# Altium PCB Payload.PcbDoc
Units mm, origin at the board's own origin, x right, y up, seen from the top; angles counter-clockwise.
Board outline 47.6 x 56 mm, 2 copper layers (Top Layer, Bottom Layer); 38 components, 56 nets, 178 pads, 137 vias.
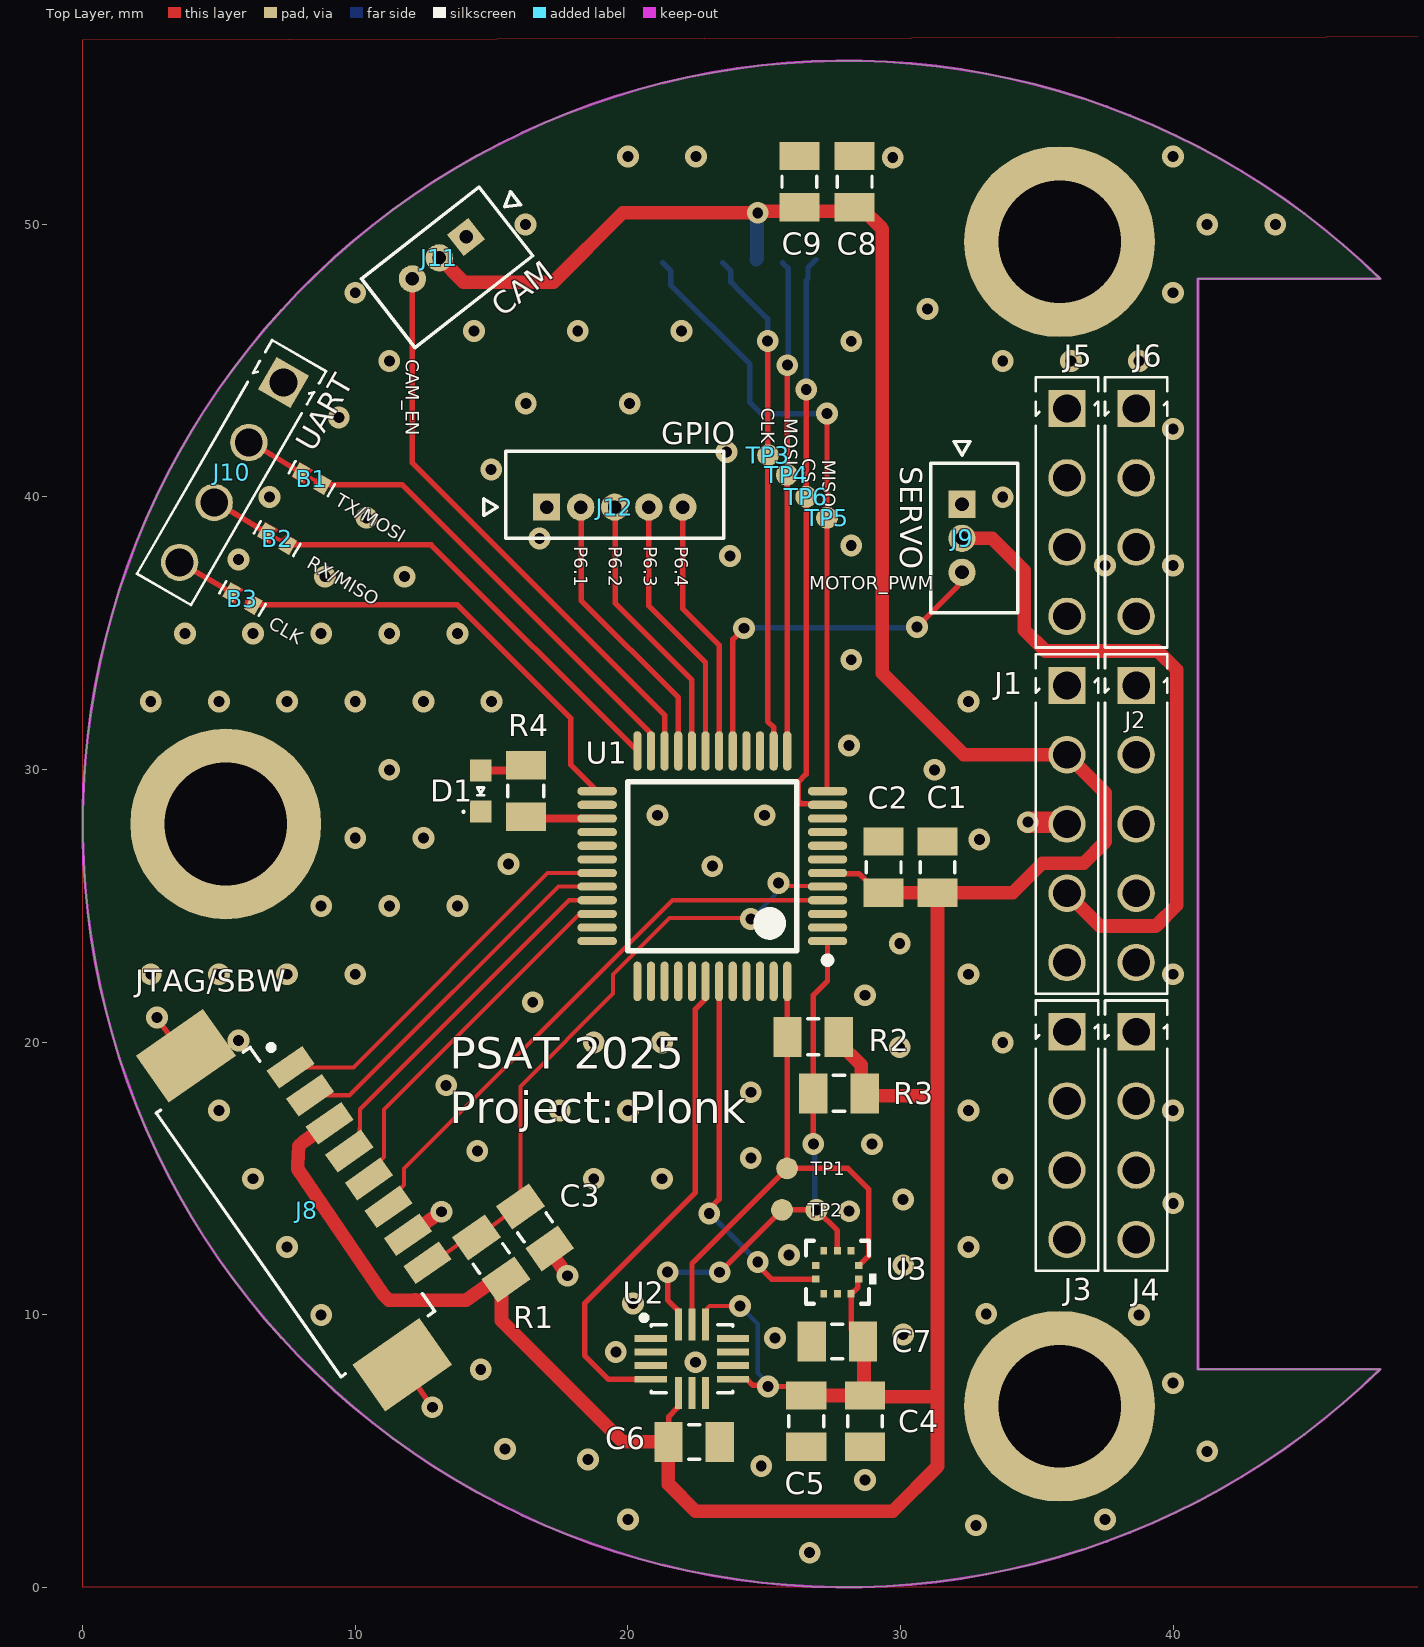
[diagram p0: Top Layer view]
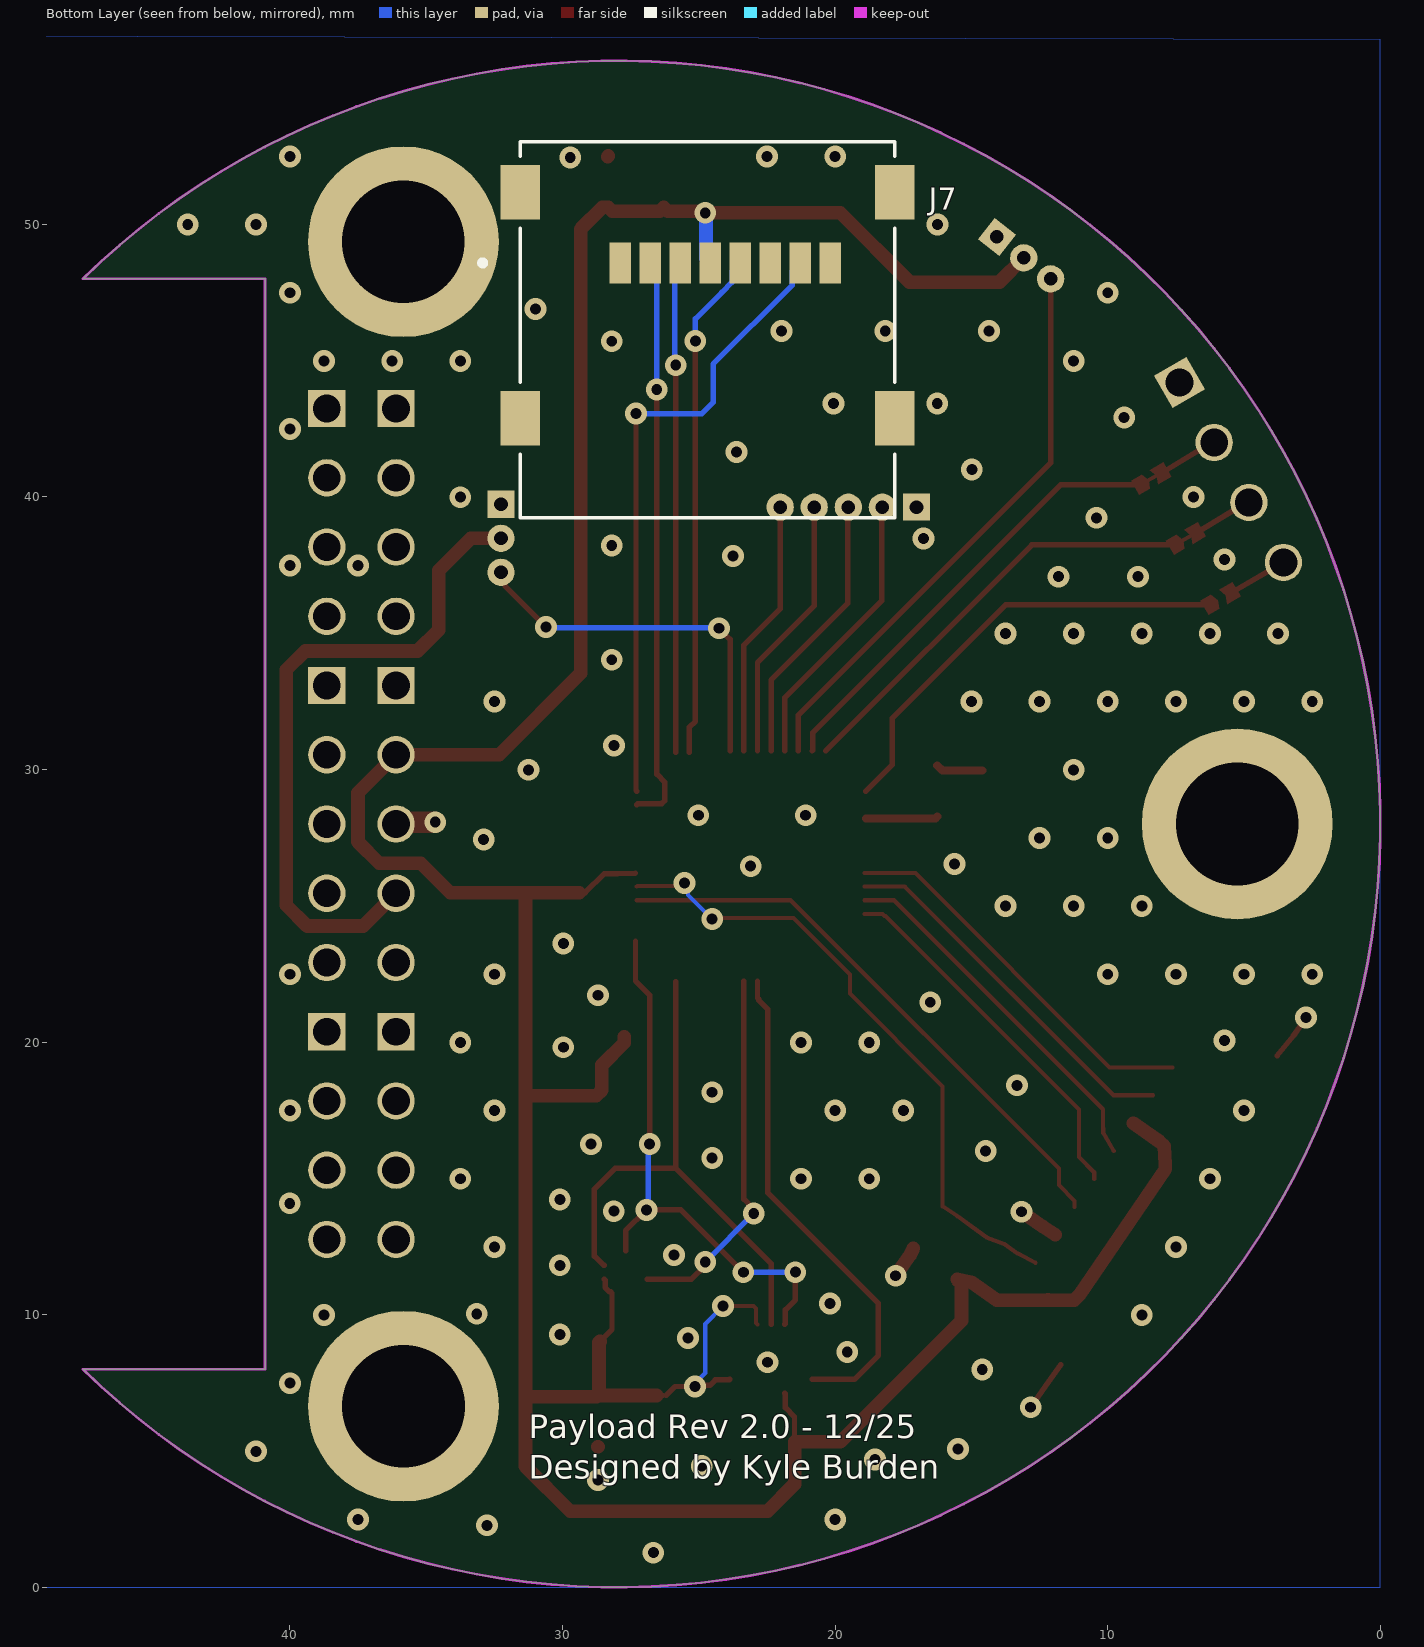
[diagram p1: Bottom Layer view, seen from below]
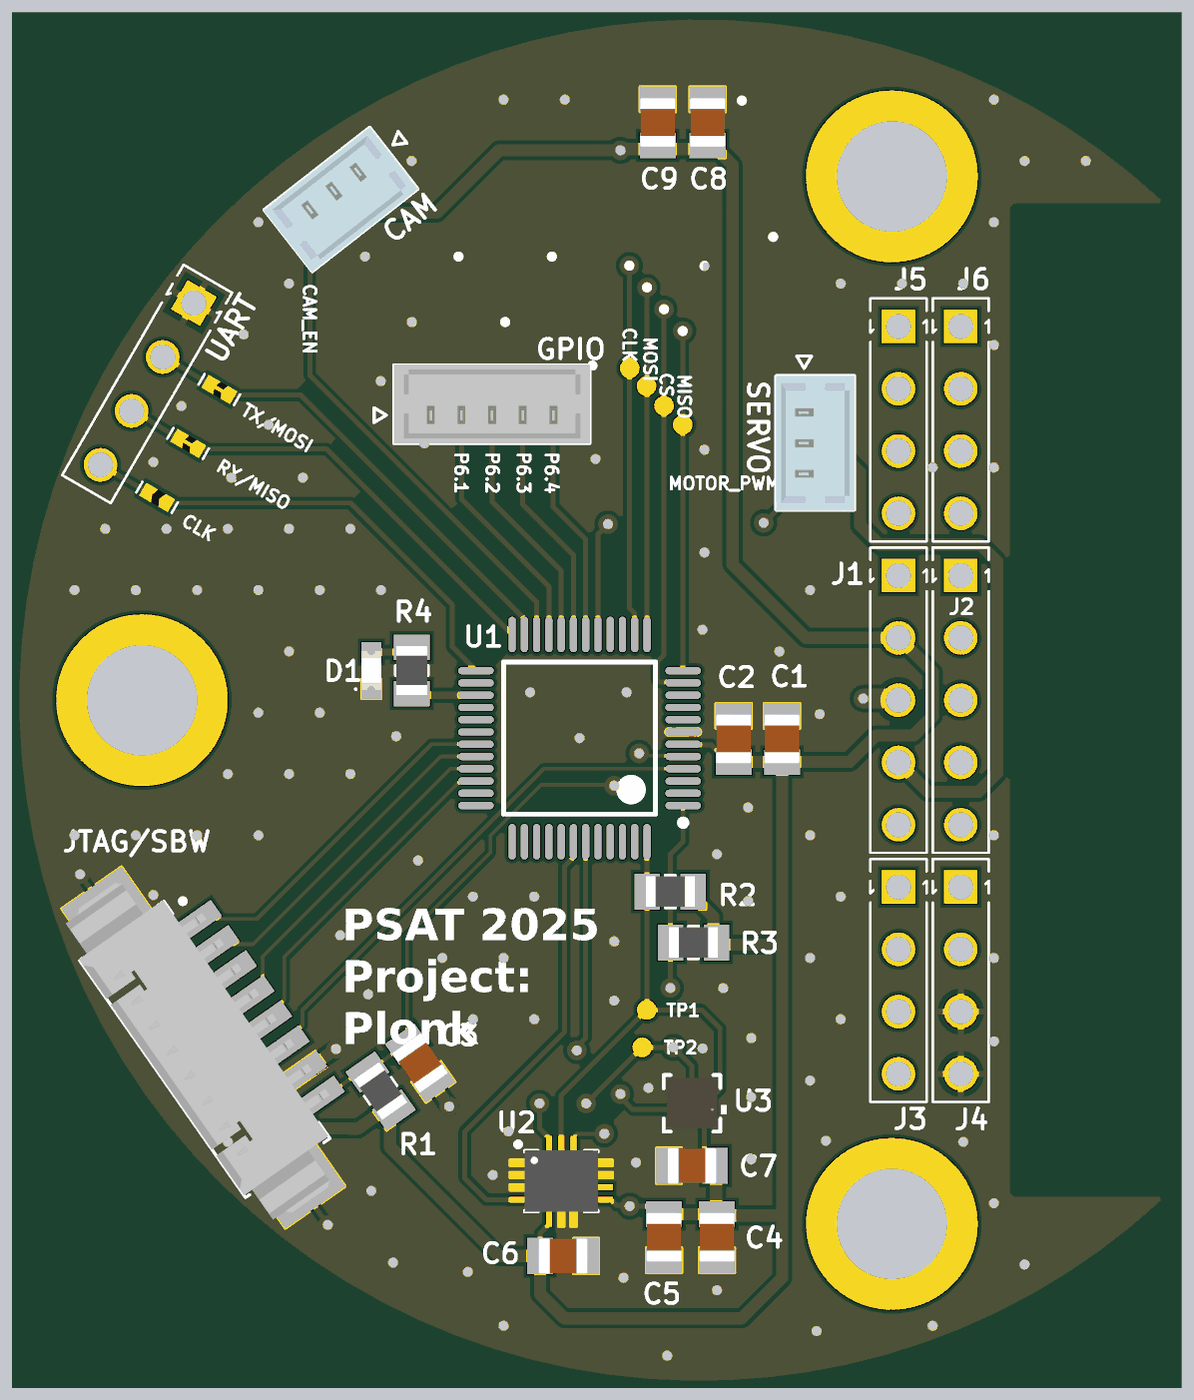
[diagram p2: 3D render of the assembled board from above, using the file's embedded part models]

## Layer stack, top to bottom
Top Solder: solder mask 0.0102, Solder Resist, Dk 3.5
Top Layer: signal copper 0.0356
Dielectric 1: dielectric 0.32, FR-4, Dk 4.8
Bottom Layer: signal copper 0.0356
Bottom Solder: solder mask 0.0102, Solder Resist, Dk 3.5

## Board outline
47.596,8 cw(c28,28) 47.596,48 47.6,48 40.913,48 40.913,8

## Design rules (kind name [scope] priority, off if disabled: settings)
BoardOutlineClearance [All] p1: gap=0.254 ignorepadtopadclearanceinfootprint=FALSE except(0: Arc-SplitContinuation Track-SplitContinuation SMDPad-SplitContinuation THPad-SplitContinuation Via-SplitContinuation Fill-SplitContinuation Poly-SplitContinuation Region-SplitContinuation Text-SplitContinuation)
Clearance [All] p1: gap=0.152 ignorepadtopadclearanceinfootprint=FALSE
ComponentClearance [All] p1: gap=0.1 collisioncheckmode=3 verticalgap=0.254 showdistances=FALSE
HoleSize [All] p1: absolutevalues=TRUE maxlimit=6.2 minlimit=0.3 maxpercent=80.000 minpercent=20.000
MinimumAnnularRing [All] p1: minimumring=0.15
MinimumSolderMaskSliver [All] p1: minsoldermaskwidth=0.1
PolygonConnect ViaConnect [IsVia] p1: connectstyle=Direct reliefconductorwidth=0.254 reliefentries=4 polygonreliefangle="90 Angle" airgapwidth=0.254
PolygonConnect [All] p2: thpad.connectstyle=Relief thpad.reliefconductorwidth=0.254 thpad.reliefentries=4 thpad.polygonreliefangle="90 Angle" thpad.airgapwidth=0.254 smdpad.connectstyle=Direct smdpad.reliefconductorwidth=0.254 smdpad.reliefentries=4 smdpad.polygonreliefangle="90 Angle" smdpad.airgapwidth=0.254 via.connectstyle=Relief via.reliefconductorwidth=0.254 via.reliefentries=4 via.polygonreliefangle="90 Angle" via.airgapwidth=0.254
RoutingVias [All] p1: holewidth=0.3 width=0.6 viastyle="Through Hole" minholewidth=0.3 minwidth=0.5 maxholewidth=1 maxwidth=5
SilkToSilkClearance [All] p1: silktosilkclearance=0.1
SilkToSolderMaskClearance [IsPad] p1: minsilkscreentomaskgap=0.1 clearancetoexposedcopper=TRUE
SolderMaskExpansion [All] p1: expansion=0.051 istentingtop=FALSE
SupplyNets "Schematic Supply Nets_3" [InNet('LED_RED')] p1: voltage=0.000
SupplyNets "Schematic Supply Nets_2" [InNet('+3V3')] p2: voltage=0.000
SupplyNets "Schematic Supply Nets_1" [InNet('GND')] p3: voltage=0.000
SupplyNets "Schematic Supply Nets" [InNet('+5V')] p4: voltage=0.000
Width [All] p1: maxlimit=25.4 minlimit=0.15 preferedwidth=0.3
25 further rules are at their usual default settings.

## Components (designator, comment, footprint, x,y, rotation, side; value= is the part's Value field where it differs from the comment)
B1 "Solder Jumper Normally Closed" "Solder Bridge Chevron 0402 Closed" 8.404,40.668 r150 top locked net-tie
B2 "Solder Jumper Normally Closed" "Solder Bridge Chevron 0402 Closed" 7.134,38.469 r150 top locked net-tie
B3 "Solder Jumper Normally Open" "Solder Bridge Chevron 0402 Open" 5.864,36.269 r150 top locked
C1 "22u" CAPACITOR_0805_2012M-70N 31.36,26.421 r270 top
C2 "100n" CAPACITOR_0805_2012M-70N 29.385,26.421 r270 top
C3 "10n" CAPACITOR_0805_2012M-70N 16.595,13.203 r125 top
C4 "2u2" CAPACITOR_0805_2012M-70N 28.702,6.096 r90 top
C5 "100n" CAPACITOR_0805_2012M-70N 26.543,6.096 r90 top
C6 "10n" CAPACITOR_0805_2012M-70N 22.428,5.334 r180 top
C7 "100n" CAPACITOR_0805_2012M-70N 27.686,9.017 r0 top
C8 "22u" CAPACITOR_0805_2012M-70N 28.321,51.562 r270 top
C9 "100n" CAPACITOR_0805_2012M-70N 26.289,51.562 r270 top
D1 "LTST-C190 Series" LED_0603_1608M_0.80mm 14.605,29.21 r90 top
J1 "Header - 2.54mm,1x5-pin" HEADER_2.54MM_1X5PIN 36.107,28 r270 top locked
J2 "Header - 2.54mm,1x5-pin" HEADER_2.54MM_1X5PIN 38.647,28 r270 top locked
J3 "Header - 2.54mm,1x4-pin" HEADER_2.54MM_1X4PIN 36.107,16.57 r270 top locked
J4 "Header - 2.54mm,1x4-pin" HEADER_2.54MM_1X4PIN 38.647,16.57 r270 top locked
J5 "Header - 2.54mm,1x4-pin" HEADER_2.54MM_1X4PIN 36.107,39.43 r270 top locked
J6 "Header - 2.54mm,1x4-pin" HEADER_2.54MM_1X4PIN 38.647,39.43 r270 top locked
J7 "MSD-10-C" MSD-10-C 24.681,46.131 r0 bottom locked
J8 "0532610871" MOLEX_0532610871 7.762,13.827 r305 top locked
J9 "0530470310" MOLEX_0530470310 32.258,38.481 r90 top
J10 "HDR,2.54mm,1x4" HEADER_2.54MM_1x4PIN 5.461,40.894 r240 top
J11 "0530470310" MOLEX_0530470310 13.081,48.768 r38 top
J12 "0530470510" MOLEX_0530470510 19.518,39.624 r180 top
R1 "47k" RESISTOR_0805_2012M-50N 14.986,12.065 r305 top
R2 "4k7" RESISTOR_0805_2012M-50N 26.797,20.193 r0 top
R3 "4k7" RESISTOR_0805_2012M-50N 27.745,18.116 r0 top
R4 "150R" Resistor_0805_2012M-50N 16.256,29.21 r270 top
TP1 "Test Point" "Test Point Pad Medium" 25.841,15.367 r90 top
TP2 "Test Point" "Test Point Pad Medium" 25.654,13.843 r90 top
TP3 "Test Point" "Test Point Pad Medium" 25.146,41.529 r90 top
TP4 "Test Point" "Test Point Pad Medium" 25.831,40.809 r90 top
TP5 "Test Point" "Test Point Pad Medium" 27.305,39.231 r90 top
TP6 "Test Point" "Test Point Pad Medium" 26.543,40.005 r90 top
U1 "MSP430FR2355" PT0048A_N 23.099,26.453 r180 top
U2 "ICM-42670-P" XDCR_ICM-42670-P-EXTENDED_PADS 22.352,8.382 r0 top
U3 "BMP390" BMP390 27.686,11.557 r180 top

## Footprints (in the part's own frame and the unit in brackets; to place one, negate y for a bottom-side part, rotate by r counter-clockwise, add the part's x,y. Pads: shape width x height; smd on the part's side, far side on the other; paste and mask are expansions set on the pad)
BMP390 [mil] "Pressure Sensor"
  rect 11x10 smd paste+0 mask+0: 1(-31,9.84) 2(-31,-9.84) 6(31,-9.84) 7(31,9.84)
  rect 10x11 smd paste+0 mask+0: 3(-19.68,-31) 4(0,-31) 5(19.68,-31) 8(19.68,31) 9(0,31) 10(-19.68,31)
  silkscreen extent -56,-46 46,46, body extent -41,-41 41,41, height 32
CAPACITOR_0805_2012M-70N [mm] "Capacitor, 0805 (2012 metric), 0.7mm high, nominal pads,"
  rect 1.04x1.47 smd mask+0.051: 1(-0.94,0) 2(0.94,0)
  silkscreen extent -0.2,-0.64 0.2,0.64, body extent -1,-0.73 1,0.73, height 1.23
HEADER_2.54MM_1X4PIN [mm]
  rect 1.37x1.37 hole 1.02: 1(-3.81,0)
  round 1.37 hole 1.02: 2(-1.27,0) 3(1.27,0) 4(3.81,0)
  silkscreen extent -4.95,-1.14 4.95,1.14
HEADER_2.54MM_1x4PIN [mm]
  rect 1.37x1.37 hole 1.02: 1(-3.81,0)
  round 1.37 hole 1.02: 2(-1.27,0) 3(1.27,0) 4(3.81,0)
  silkscreen extent -4.95,-1.14 4.95,1.14, body extent -4.95,-1.14 4.95,1.14, height 8.2
HEADER_2.54MM_1X5PIN [mm]
  rect 1.37x1.37 hole 1.02: 1(-5.08,0)
  round 1.37 hole 1.02: 2(-2.54,0) 3(0,0) 4(2.54,0) 5(5.08,0)
  silkscreen extent -6.22,-1.14 6.22,1.14
LED_0603_1608M_0.80mm [mm] "LED, 0603 (1608 metric), 0.8mm high"
  rect 0.8x0.8 smd mask+0.051: A(0.75,0) C(-0.75,0)
  silkscreen extent -0.79,-0.12 0.13,0.66, body extent -0.8,-0.4 0.8,0.4, height 0.8
MOLEX_0530470310 [mm] "Header - Picoblade 03-pin, TH, STR, 4.2mm height"
  rect 1x1 hole 0.5 mask+0.051: 1(1.25,0)
  round 1 hole 0.5 mask+0.051: 2(0,0) 3(-1.25,0)
  silkscreen extent -2.73,-2.05 3.55,1.15, body extent -2.75,-2.06 2.75,1.14, height 4.21
MOLEX_0530470510 [mm] "Header - Picoblade 05-pin, TH, STR, 4.2mm height"
  rect 1x1 hole 0.5 mask+0.051: 1(2.5,0)
  round 1 hole 0.5 mask+0.051: 2(1.25,0) 3(0,0) 4(-1.25,0) 5(-2.5,0)
  silkscreen extent -4,-2.05 4.8,1.15, body extent -4.01,-2.06 3.99,1.14, height 4.21
MOLEX_0532610871 [mm] "Header - Picoblade 08-pin, SMT, RA, 3.4mm height"
  rect 0.8x1.6 smd mask+0.051: 1(-4.375,2.9) 2(-3.125,2.9) 3(-1.875,2.9) 4(-0.625,2.9) 5(0.625,2.9) 6(1.875,2.9) 7(3.125,2.9) 8(4.375,2.9)
  rect 2.1x3 smd mask+0.051: MP1(-6.925,0) MP2(6.905,0)
  silkscreen extent -5.83,-2.1 5.99,2.83, body extent -7.57,-2.1 7.58,3.1, height 3.42
MSD-10-C [mm] "SM Micro SD Card Connector"
  rect 0.8x1.5 smd: 01(3.2,-2.45) 02(2.1,-2.45) 03(1,-2.45) 04(-0.1,-2.45) 05(-1.2,-2.45) 06(-2.3,-2.45) 07(-3.4,-2.45) 08(-4.5,-2.45)
  rect 1.45x2 smd: G1(-6.875,3.25) G2(6.875,3.25) G3(-6.875,-5.05) G4(6.875,-5.05)
  silkscreen extent -6.88,-6.9 8.35,6.9, body extent -7.3,-7.1 7.3,7.1, height 1.89
PT0048A_N [mm]
  oval 1.45x0.3 smd paste+0 mask+0.051: 1(-4.225,2.75) 2(-4.225,2.25) 3(-4.225,1.75) 4(-4.225,1.25) 5(-4.225,0.75) 6(-4.225,0.25) 7(-4.225,-0.25) 8(-4.225,-0.75) 9(-4.225,-1.25) 10(-4.225,-1.75) 11(-4.225,-2.25) 12(-4.225,-2.75) 25(4.225,-2.75) 26(4.225,-2.25) 27(4.225,-1.75) 28(4.225,-1.25) 29(4.225,-0.75) 30(4.225,-0.25) 31(4.225,0.25) 32(4.225,0.75) 33(4.225,1.25) 34(4.225,1.75) 35(4.225,2.25) 36(4.225,2.75)
  oval 0.3x1.45 smd paste+0 mask+0.051: 13(-2.75,-4.225) 14(-2.25,-4.225) 15(-1.75,-4.225) 16(-1.25,-4.225) 17(-0.75,-4.225) 18(-0.25,-4.225) 19(0.25,-4.225) 20(0.75,-4.225) 21(1.25,-4.225) 22(1.75,-4.225) 23(2.25,-4.225) 24(2.75,-4.225) 37(2.75,4.225) 38(2.25,4.225) 39(1.75,4.225) 40(1.25,4.225) 41(0.75,4.225) 42(0.25,4.225) 43(-0.25,4.225) 44(-0.75,4.225) 45(-1.25,4.225) 46(-1.75,4.225) 47(-2.25,4.225) 48(-2.75,4.225)
  silkscreen extent -4.35,-3.1 3.1,3.57, body extent 0,0 0.25,0.25, height 0.25
RESISTOR_0805_2012M-50N [mm] "Resistor, 0805 (2012 metric), nominal pads"
  rect 1.04x1.47 smd mask+0.051: 1(-0.94,0) 2(0.94,0)
  silkscreen extent -0.2,-0.66 0.2,0.66, body extent -1,-0.63 1,0.62, height 0.5
Resistor_0805_2012M-50N [mm] "Resistor, 0805 (2012 metric), nominal pads"
  rect 1.04x1.47 smd mask+0.051: 1(-0.94,0) 2(0.94,0)
  silkscreen extent -0.2,-0.66 0.2,0.66, body extent -1,-0.63 1,0.62, height 0.5
"Solder Bridge Chevron 0402 Closed" [mm] "Small solder bridge. Shorted."
  rect 0.44x0.6 smd paste-2539.97 mask+0: 1(-0.457,0) 2(0.457,0)
  Top Layer region: 0.677,0.3 0.677,0 0.227,0 0.113,0.3
  Top Layer region: 0.677,-0.3 0.677,0 0.227,0 0.113,-0.3
  Top Layer region: -0.677,-0.3 -0.677,0.3 -0.237,0.3 -0.112,0 -0.237,-0.3
  Top Layer lines w0.15: 0.25,0 -0.2,0
  silkscreen extent -0.83,-0.25 0.83,0.25
"Solder Bridge Chevron 0402 Open" [mm] "Small solder bridge. Open."
  rect 0.44x0.6 smd paste-2539.97 mask+0: 1(-0.457,0) 2(0.457,0)
  Top Layer region: -0.677,-0.3 -0.677,0.3 -0.237,0.3 -0.112,0 -0.237,-0.3
  Top Layer region: 0.677,-0.3 0.677,0 0.227,0 0.113,-0.3
  Top Layer region: 0.677,0.3 0.677,0 0.227,0 0.113,0.3
  silkscreen extent -0.83,-0.25 0.83,0.25
"Test Point Pad Medium" [mm] "Exposed copper pad, 0.8mm dia."
  round 0.8 smd paste-10 mask+0.051: 1(0,0)
XDCR_ICM-42670-P-EXTENDED_PADS [mm]
  rect 1.175x0.25 smd paste-1 mask+0.05: 1(-1.512,0.75) 2(-1.512,0.25) 3(-1.512,-0.25) 4(-1.512,-0.75) 8(1.512,-0.75) 9(1.512,-0.25) 10(1.512,0.25) 11(1.512,0.75)
  rect 0.25x1.175 smd paste-1 mask+0.05: 5(-0.5,-1.262) 6(0,-1.262) 7(0.5,-1.262) 12(0.5,1.262) 13(0,1.262) 14(-0.5,1.262)
  silkscreen extent -1.86,-1.25 1.5,1.6, body extent -1.5,-1.25 1.5,1.25, height 0.81

## Part data
C1 C2 C3 C4 C5 C6 C7 C8 C9: library part "Generic Capacitor", "Passive - Capacitor, Generic", Tolerance=?%
D1: "Diode - LED, 0603", Colour=RED, Package=0603, Rated Voltage="5V Reverse", Temp Range="-30°C ~ 85°C", APSS Standard Part="APSS Standard", Supplier 1=Digikey
J7: "SM Micro SD Card Connector", ComponentLink1Description=Datasheet, ComponentLink1URL=https://www.sameskydevices.com/product/resource/msd-10-c.pdf
J8: "Connector - Picoblade 08-pin, SMT, RA", Supplier 1 Part No.=WM7626CT-ND, APSS Standard Part="APSS Standard", MF Part No.=0532610871, Mounting Type="Surface Mount", Orientation="Right Angle", Pins=8, Pitch=1.25mm, Supplier 1=Digikey
J9 J11: "Connector - Picoblade 03-pin, TH, STR", Supplier 1 Part No.=WM1732-ND, APSS Standard Part="APSS Standard", MF Part No.=0530470310, Mounting Type=Through-hole, Orientation=Straight, Pins=3, Pitch=1.25mm, Supplier 1=Digikey
J10: "Connector - 2.54mm, 1x4-pin"
J12: "Connector - Picoblade 05-pin, TH, STR", Supplier 1 Part No.=WM1734-ND, APSS Standard Part="APSS Standard", MF Part No.=0530470510, Mounting Type=Through-hole, Orientation=Straight, Pins=5, Pitch=1.25mm, Supplier 1=Digikey
R1 R2 R3: library part "Generic Resistor", "Passive - Resistor, Generic", Tolerance=?%
R4: library part "RES SM 0805", "0805 Surface Mount Resistor"
U1: "24-MHz 105-C integrated analog microcontroller with 32-KB FRAM, Op-Amps/PGAs, 12-bit DACs, 12-bit AD", ComponentLink1Description=Datasheet, ComponentLink1URL=https://www.ti.com/lit/ds/symlink/msp430fr2355.pdf?HQS=dis-dk-null-digikeymode-dsf-pf-null-wwe&ts=1766128428387&ref_url=https%253A%252F%252Fwww.ti.com%252Fgeneral%252Fdocs%252Fsuppproductinfo.tsp%253FdistId%253D10%2526gotoUrl%253Dhttps%253A%252F%252Fwww.ti.com%252Flit%252Fgpn%252Fmsp430fr2355
U2: "IC - Inertial Management Unit: Accelerometer + Gyro + Temperature Sensor, 6 Axis, I2C / I3C / SPI Interfaces", Package=14-LGA, Rated Voltage=3.6V, Supplier 1 Part No.=1428-ICM-42670-PCT-ND, Temp Range="-40°C ~ 85°C", APSS Standard Part="APSS Standard", MF Part No.=ICM-42670-P, Supplier 1=Digikey
U3: "Pressure Sensor", ComponentLink1Description=Datasheet, ComponentLink1URL=https://www.bosch-sensortec.com/products/environmental-sensors/pressure-sensors/bmp390/
B1 B2 B3: DEBUG=DEBUG

## Free pads (board coordinates)
  round 7 hole 4.5: 1(5.25,28) 1(35.837,6.643) 1(35.837,49.357)

## Via types
v1: diameter 0.8, hole 0.4, Top Layer to Bottom Layer, tented both sides, 137 vias

## Nets (pads, with @x,y where several pads share a name; then routed paths per layer and width w, separated by ;. In a path a pad name is that pad's centre, name@x,y a point inside that pad or via, vN(x,y) a via of type N, cw(c..) or ccw(c..) an arc to the next point about the centre after c; other vN are vias at no path point)
1V8_PG: J2.1
3V3_PG: J2.2
+1V8: J1.1
+3V3: C1.2 C2.2 C4.2 C5.2 C6.2 C7.2 C8.2 C9.2 J1.2 J7.04 J8.3 J11.2 R1.2 R2.2 R3.2 U1.6 U2.5 U2.8 U2.12 U3.1 U3.10 | length 139.6
  Top Layer w0.15: U2.12 22.902,9.694 22.902,10.23 22.99,10.317 v1(24.108,10.317)
  Top Layer w0.2: C6.2 21.492,5.338 21.492,6.252 21.827,6.587 21.827,7.094 U2.5 ; U2.8 23.89,7.607 24.397,7.607 24.597,7.407 25.105,7.407 v1(25.146,7.366) 25.871,7.366 C5.2@26.201,7.036 ; C5.2@26.328,7.036 C5.2 ; U1.6 27.343,26.184 27.988,26.184 27.992,26.181 28.47,26.181 29.17,25.481 C2.2 ; U3.10@28.186,10.757 28.186,9.457 C7.2 ; U3.10 28.186,10.782 28.238,10.834 28.27,10.834 28.438,11.003 28.438,11.272 U3.1
  Top Layer w0.5: J8.3 8.611,16.71 8.094,16.348 7.93,16.184 7.885,15.523 7.885,15.351 11.051,10.714 11.231,10.535 11.442,10.535 12.192,10.541 cw(c12.195,10.139) 12.197,10.541 13.907,10.532 14.066,10.532 15.006,11.19 R1.2 15.367,11.137 15.367,9.779 19.812,5.334 C6.2 21.488,3.785 22.479,2.794 29.718,2.794 31.36,4.436 31.36,6.985 ; J11.2 13.97,47.879 17.272,47.879 19.812,50.419 v1(24.765,50.419) 24.822,50.476 26.143,50.476 C9.2 26.434,50.477 28.176,50.477 C8.2 28.536,50.622 29.337,49.821 29.337,33.528 32.325,30.54 J1.2 37.504,29.143 37.504,27.344 36.722,26.562 35.198,26.562 34.117,25.481 C1.2 ; C5.2 C4.2 ; R2.2 27.737,19.978 28.557,19.158 28.557,18.244 28.767,18.034 31.36,18.034 ; C7.2 28.664,8.979 28.664,7.074 C4.2 ; C2.2 C1.2 ; C4.2 28.753,6.985 31.36,6.985 ; 31.36,6.985 31.36,18.034 ; 31.36,18.034 C1.2
  Bottom Layer w0.15: v1(24.108,10.317) 24.765,9.661 24.765,7.869 25.146,7.488 v1(25.146,7.366)
  Bottom Layer w0.5: J7.04@24.708,48.708 24.736,48.736 24.736,50.39 v1(24.765,50.419)
+5V: J1.4 J9.2 | length 24.6
  Top Layer w0.5: J9.2 33.362,38.481 34.544,37.299 34.544,35.119 35.316,34.347 39.44,34.347 40.132,33.654 40.132,25.019 39.37,24.257 37.31,24.257 J1.4
BUZZER_EN: J3.4
CAM_EN: J11.3 U1.22 | length 21.2
  Top Layer w0.2: J11.3 12.096,41.244 21.349,31.991 U1.22
EN_1V8: J2.3
EN_3V3: J2.4
EN_5V: J2.5
GND: C1.1 C2.1 C3.1 C4.1 C5.1 C6.1 C7.1 C8.1 C9.1 D1.C J1.3 J4.3 J4.4 J7.06 J7.G1 J7.G2 J7.G3 J7.G4 J8.7 J8.MP1 J8.MP2 J9.1 J10.1 J11.1 J12.1 U1.7 U2.1 U2.2 U2.3 U2.6 U2.7 U2.10 U2.11 U3.3 U3.5 U3.6 U3.8 U3.9 | length 7.9
  Top Layer w0.2: v1(2.724,20.9) 3.188,20.237 J8.MP1 ; J8.MP2 12.273,7.396 v1(12.827,6.604)
  Top Layer w0.5: J8.7 12.388,13.235 v1(13.161,13.777) ; C3.1 17.251,12.185 v1(17.78,11.43) ; C8.1 C8.1@28.347,52.476 ; C4.1 C4.1
  Top Layer w0.8: v1(34.671,28.067) 36.04,28.067 J1.3
  other v1: 26.67,1.27 32.766,2.274 20,2.488 37.5,2.488 28.702,3.937 24.892,4.445 18.542,4.687 41.25,4.988 15.494,5.068 40,7.488 14.605,7.989 22.479,8.255 19.558,8.636 25.4,9.144 30.099,9.271 8.75,9.988 38.75,9.988 33.147,10.033 20.193,10.414 30.099,11.811 25.908,12.192 7.5,12.488 32.5,12.488 28.118,13.798 40.005,14.085 30.099,14.224 6.25,14.988 18.75,14.988 21.25,14.988 33.75,14.988 24.511,15.748 14.478,16.002 28.956,16.256 5,17.488 17.5,17.488 20,17.488 32.5,17.488 40,17.488 24.511,18.161 13.335,18.415 29.972,19.812 18.75,19.988 21.25,19.988 33.75,19.988 5.715,20.054 16.51,21.463 28.702,21.717 2.5,22.488 5,22.488 7.5,22.488 10,22.488 32.5,22.488 40,22.488 29.972,23.622 8.75,24.988 11.25,24.988 13.75,24.988 23.099,26.453 15.621,26.531 32.893,27.432 10,27.488 12.5,27.488 21.082,28.321 25.019,28.321 11.25,29.988 31.25,29.988 28.115,30.877 2.5,32.488 5,32.488 7.5,32.488 10,32.488 12.5,32.488 15,32.488 32.5,32.488 28.194,34.024 3.75,34.988 6.25,34.988 8.75,34.988 11.25,34.988 13.75,34.988 8.89,37.072 11.811,37.072 37.5,37.488 40,37.488 5.715,37.707 23.749,37.834 28.194,38.215 16.764,38.469 10.414,39.231 33.75,39.988 6.858,39.993 14.986,41.009 23.622,41.644 40,42.488 9.398,42.914 16.256,43.422 20.066,43.422 11.25,44.988 33.75,44.988 36.25,44.988 38.75,44.988 28.194,45.708 14.351,46.089 18.161,46.089 21.971,46.089 30.996,46.893 10,47.488 40,47.488 16.25,49.988 41.25,49.988 43.75,49.988 29.718,52.451 20,52.488 22.5,52.488 40,52.488
GPIO_6.1: J12.2 U1.21 | length 10.4
  Top Layer w0.2: J12.2 18.288,39.604 18.288,36.195 21.849,32.634 U1.21
GPIO_6.2: J12.3 U1.20 | length 10.1
  Top Layer w0.2: J12.3 19.538,39.604 19.538,36.088 22.349,33.277 U1.20
GPIO_6.3: J12.4 U1.19 | length 9.8
  Top Layer w0.2: J12.4 20.768,36.001 22.849,33.92 U1.19
GPIO_6.4: J12.5 U1.18 | length 9.5
  Top Layer w0.2: J12.5 22.018,35.894 23.349,34.563 U1.18
GPS_EN: J3.3
GPS_RX: J3.2
GPS_TX: J3.1
I2C_SCL: J6.4
I2C_SDA: J6.3
IMU_INT: U1.42 U2.4 | length 18.3
  Top Layer w0.2: U2.4 19.292,7.632 18.415,8.509 18.415,10.414 22.479,14.478 22.479,21.215 22.799,21.534 22.799,21.576 22.849,21.626 U1.42
JTAG_TEST/SBW_TCK: J8.6 U1.4 | length 21.2
  Top Layer w0.15: J8.6 11.213,14.171 11.795,14.754 11.795,15.359 21.64,25.203 U1.4@27.279,25.203
LED_RED: R4.2 U1.27 | length 2.6
  Top Layer w0.3: R4.2 16.323,28.203 U1.27
LoRa_CS: J5.1
LORA_RX_IRQ: J4.1
MOTOR_PWM: J9.3 U1.17 | length 13.7
  Top Layer w0.2: U1.17 23.849,34.771 v1(24.257,35.179) ; v1(30.608,35.231) 32.105,36.728 32.105,37.078 J9.3
  Bottom Layer w0.2: v1(24.257,35.179) 24.283,35.205 30.582,35.205 v1(30.608,35.231)
MSP_P1.0: J6.1
MSP_P1.1: J6.2
MSP_P5.2: J4.2
NetB1_2: B1.2 J10.2 | length 2.4
  Top Layer w0.2: J10.2@5.969,42.121 8.003,40.888 B1.2@8.017,40.879
NetB2_2: B2.2 J10.3 | length 2.4
  Top Layer w0.2: J10.3@4.699,39.921 6.733,38.689 B2.2@6.737,38.686
NetB3_2: B3.2 J10.4 | length 2.4
  Top Layer w0.2: J10.4@3.429,37.721 3.439,37.684 3.476,37.647 3.495,37.628 5.36,36.551 B3.2@5.458,36.495
NetD1_A: D1.A R4.1 | length 1.7
  Top Layer w0.3: D1.A 16.066,29.96 R4.1
PU_INT: U1.43 U3.7 | length 13.6
  Top Layer w0.2: v1(22.987,13.716) 22.987,13.878 23.349,14.24 U1.43 ; v1(24.765,11.938) 24.765,11.811 25.269,11.307 U3.7
  Bottom Layer w0.2: v1(22.987,13.716) v1(24.765,11.938)
Reset/SBW_TDIO: C3.2 J8.8 R1.1 U1.5 | length 23.4
  Top Layer w0.15: J8.8 J8.8@13.297,12.242 ; J8.8@13.298,12.242 13.807,12.598 R1.1 14.981,13.223 15.508,13.605 C3.2 ; C3.2@16.059,13.975 16.059,18.378 19.46,21.779 19.46,22.486 21.521,24.547 24.475,24.547 v1(24.511,24.511) ; v1(25.527,25.831) 25.626,25.732 27.25,25.732 U1.5@27.279,25.703
  Bottom Layer w0.15: v1(24.511,24.511) 25.403,25.403 25.403,25.706 v1(25.527,25.831)
SPI_MISO: J5.4
SPI_MOSI: J5.3
SPI_SCK: J5.2
UCA0_CLK/JTAG_TMS: J8.4 U1.33 | length 13.6
  Top Layer w0.15: J8.4 10.166,16.67 10.174,17.063 10.174,17.229 10.171,17.537 17.837,25.203 U1.33@18.919,25.203
UCA0_RX/MISO/JTAG_TDI: J8.2 U1.32 | length 13.7
  Top Layer w0.15: J8.2 9.795,18.05 17.448,25.703 U1.32@18.919,25.703
UCA0_STE/JTAG_TCK: J8.5 U1.34 | length 13.6
  Top Layer w0.15: J8.5 10.496,15.224 11.049,15.777 11.049,17.526 18.151,24.628 18.183,24.628 18.258,24.703 U1.34@18.919,24.703
UCA0_TX/MOSI/JTAG_TDO: J8.1 U1.31 | length 14.2
  Top Layer w0.15: J8.1 9.93,19.074 17.059,26.203 U1.31@18.919,26.203
UCA1_CLK: B3.1 U1.25 | length 16.4
  Top Layer w0.2: B3.1 13.744,36.04 17.907,31.877 17.907,30.17 U1.25
UCA1_RX/MISO: B2.1 U1.24 | length 16
  Top Layer w0.2: B2.1 12.787,38.24 U1.24
UCA1_STE: U1.26
UCA1_TX/MOSI: B1.1 U1.23 | length 16.5
  Top Layer w0.2: B1.1 11.731,40.44 20.829,31.341 20.829,30.697 U1.23
UCB0_CLK: U1.2
UCB0_MISO/SCL: R2.1 TP1.1 U1.48 U2.13 U3.2 | length 20.3
  Top Layer w0.2: U2.13 22.352,11.878 TP1.1 ; U1.48@25.841,22.221 25.841,19.812 TP1.1 ; U3.2 28.486,11.807 28.829,12.15 28.829,13.589 28.829,14.605 28.067,15.367 TP1.1
UCB0_MOSI/SDA: R3.1 TP2.1 U1.1 U2.14 U3.4 | length 20.3
  Top Layer w0.2: v1(21.461,11.559) 21.461,10.543 21.827,10.177 21.827,9.67 U2.14 ; v1(23.368,11.557) TP2.1 v1(26.924,13.843) 27.686,13.081 U3.4 ; R3.1@26.802,18.217 26.802,21.722 27.324,22.244 U1.1 ; v1@26.805,16.264 R3.1
  Bottom Layer w0.2: v1@21.463,11.557 v1(23.368,11.557) ; v1(26.803,16.266) 26.863,16.205 26.863,13.904 v1(26.924,13.843)
UCB0_STE: U1.3
UCB1_CLK: J7.05 TP3.1 U1.14 | length 18.7
  Top Layer w0.2: v1(25.129,45.72) 25.129,31.767 25.344,31.552 25.344,30.638 U1.14@25.349,30.633
  Bottom Layer w0.2: J7.05 23.781,48.281 23.781,47.874 24.157,47.498 25.129,46.526 v1(25.129,45.72)
UCB1_CS: J7.02 TP6.1 U1.11 | length 21.2
  Top Layer w0.2: v1(26.543,43.942) 26.543,41.275 26.543,29.828 26.246,29.531 26.246,28.86 26.363,28.743 27.239,28.743 U1.11@27.279,28.703
  Bottom Layer w0.2: v1(26.543,43.942) 26.543,47.941 26.608,48.006 26.608,48.408 J7.02@26.908,48.708
UCB1_MISO/SCL: J7.07 TP5.1 U1.12 | length 23.3
  Top Layer w0.2: U1.12@27.279,29.203 27.305,29.23 v1(27.305,43.053)
  Bottom Layer w0.2: J7.07 21.581,48.281 21.581,47.761 24.476,44.866 24.476,43.469 24.892,43.053 v1(27.305,43.053)
UCB1_MOSI/SDA: J7.03 TP4.1 U1.13 | length 18
  Top Layer w0.2: U1.13@25.849,30.633 v1(25.849,44.831)
  Bottom Layer w0.2: J7.03 25.885,48.377 25.885,44.867 v1(25.849,44.831)
UCB1_STE: U1.15
Vbat: J1.5
pads on no net: J7.01 J7.08 U1.8 U1.9 U1.10 U1.16 U1.28 U1.29 U1.30 U1.35 U1.36 U1.37 U1.38 U1.39 U1.40 U1.41 U1.44 U1.45 U1.46 U1.47 U2.9

## Polygon pours and split planes (outlines as drawn)
GND on Top Layer "NONET_L-01_P-001" (solid, shelved, pour order 1): 0,0 0,56.769 53.213,56.896 53.467,0
GND on Bottom Layer "NONET_L-01_P-001" (solid, shelved, pour order 0): 0,0 0,56.769 53.213,56.896 53.467,0

## Keep-outs
Keep-Out Layer:
  the board outline again, w0.1

## Other copper
Top Layer:
  pour cut-out: 11.303,40.386 12.065,41.148 12.065,41.275 17.526,35.814 17.526,35.687 17.78,35.687 18.294,36.201 18.288,39.624 21.717,39.624 22.018,39.624 22.018,35.894 23.495,34.417 23.495,34.007 20.829,31.341 11.731,40.44
  pour cut-out: 35.814,28.702 36.449,28.702 36.449,28.575 36.83,28.194 36.83,27.686 36.791,27.686 36.341,27.235 36.332,27.244 35.69,27.244 35.43,27.504 35.439,27.513 35.439,28.38 35.456,28.38 35.803,28.727
  pour cut-out: 20.32,22.733 25.781,22.733 25.908,22.606 25.781,22.479 25.781,20.574 26.797,20.574 26.802,20.579 26.802,21.722 27.324,22.244 27.324,25.203 22.177,25.203 20.327,23.353
  pour cut-out: 25.078,11.47 24.108,10.5 24.108,10.317 22.509,10.317 22.352,10.16 22.352,11.878 22.419,11.878 25.146,14.605 25.908,13.843 24.511,12.446 24.257,12.446
  pour cut-out: 24.946,44.777 25.073,44.777 27.251,42.599 27.251,29.149 26.604,29.149 25.708,30.045 25.708,30.934 24.441,30.934 23.776,31.599 23.776,34.716 24.21,35.151 25.056,35.151
  pour cut-out: 19.667,29.421 20.131,29.885 20.447,30.353 20.447,31.877 20.066,31.877 13.208,38.735 12.787,38.24 12.814,38.24 14.351,36.703 13.744,36.096 13.744,36.04 17.907,31.877 17.907,30.17 18.874,29.203 18.88,29.21 19.558,29.21
  pour cut-out: 17.018,23.241 11.303,17.526 11.049,17.526 11.049,16.256 10.414,16.256 10.414,16.383 8.779,18.018 8.779,19.074 9.93,19.074 17.059,26.203 17.866,26.203 18.034,26.035 17.899,25.9 17.962,24.261

## Silkscreen, mask and mechanical layers (free items; w line width, h text height)
Top Overlay:
  text "CAM" at 15.393,46.566 h0.8 r38
  text "CAM_EN" at 11.852,45.045 h0.5 r270
  text "CLK" at 24.894,43.267 h0.5 r270
  text "MOSI" at 25.74,42.883 h0.5 r270
  text "GPIO" at 21.232,41.933 h0.8
  text "UART" at 8.454,41.607 h0.8 r60
  text "CS" at 26.399,41.419 h0.5 r270
  text "MISO" at 27.132,41.355 h0.5 r270
  text "SERVO" at 29.995,41.125 h0.8 r270
  text "TX/MOSI" at 9.203,39.726 h0.5 r330
  text "P6.1" at 18.036,38.187 h0.5 r270
  text "P6.2" at 19.306,38.187 h0.5 r270
  text "P6.3" at 20.576,38.187 h0.5 r270
  text "P6.4" at 21.719,38.187 h0.5 r270
  text "RX/MISO" at 8.187,37.44 h0.5 r330
  text "MOTOR_PWM" at 26.653,36.599 h0.5
  text "CLK" at 6.768,35.213 h0.5 r330
  text "JTAG/SBW" at 1.928,21.854 h0.8
  text "PSAT 2025 / Project: Plonk" at 13.462,16.637 h2
Bottom Overlay:
  text "Payload Rev 2.0 - 12/25 / Designed by Kyle Burden" at 31.242,3.683 h1.5
3D Models:
  text "Battery cutout" at 46.042,24.434 h0.8 r90
Board Outline:
  the board outline again, w0.1
Courtyard:
  lines w0.254: 41.46,9.025 41.46,47.025 49.46,47.025 49.46,9.025 41.46,9.025